# Altium PCB main_b.PcbDoc
Units mil, origin at the board's own origin, x right, y up, seen from the top; angles counter-clockwise.
Board outline 5511.81 x 2559.06 mil, 2 copper layers (Top Layer, Bottom Layer); 38 components, 33 nets, 192 pads, 5 vias.
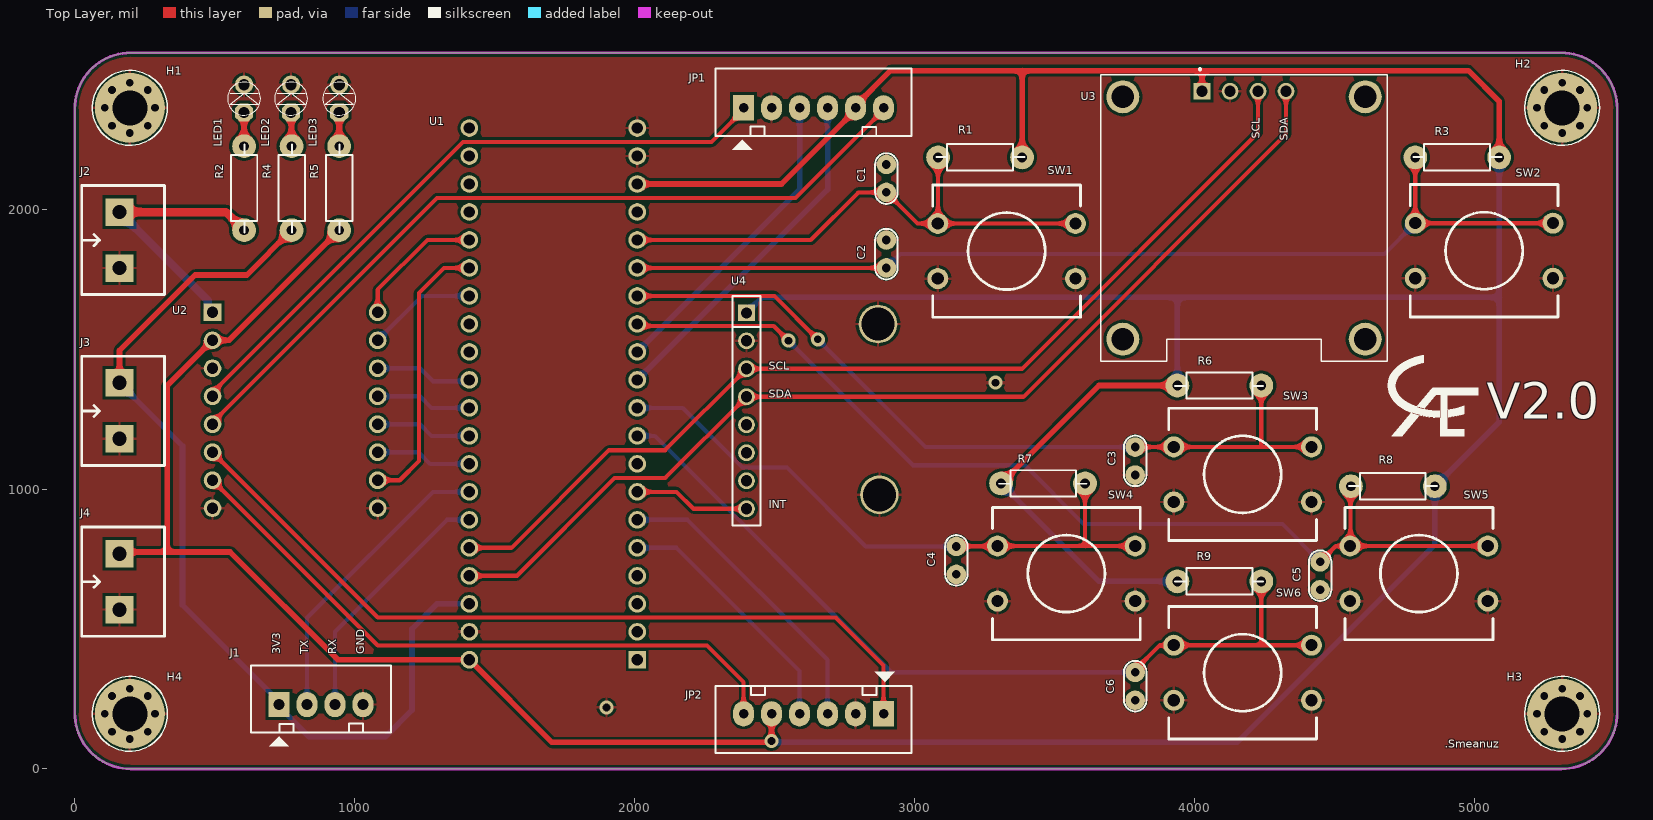
[diagram p0: Top Layer view]
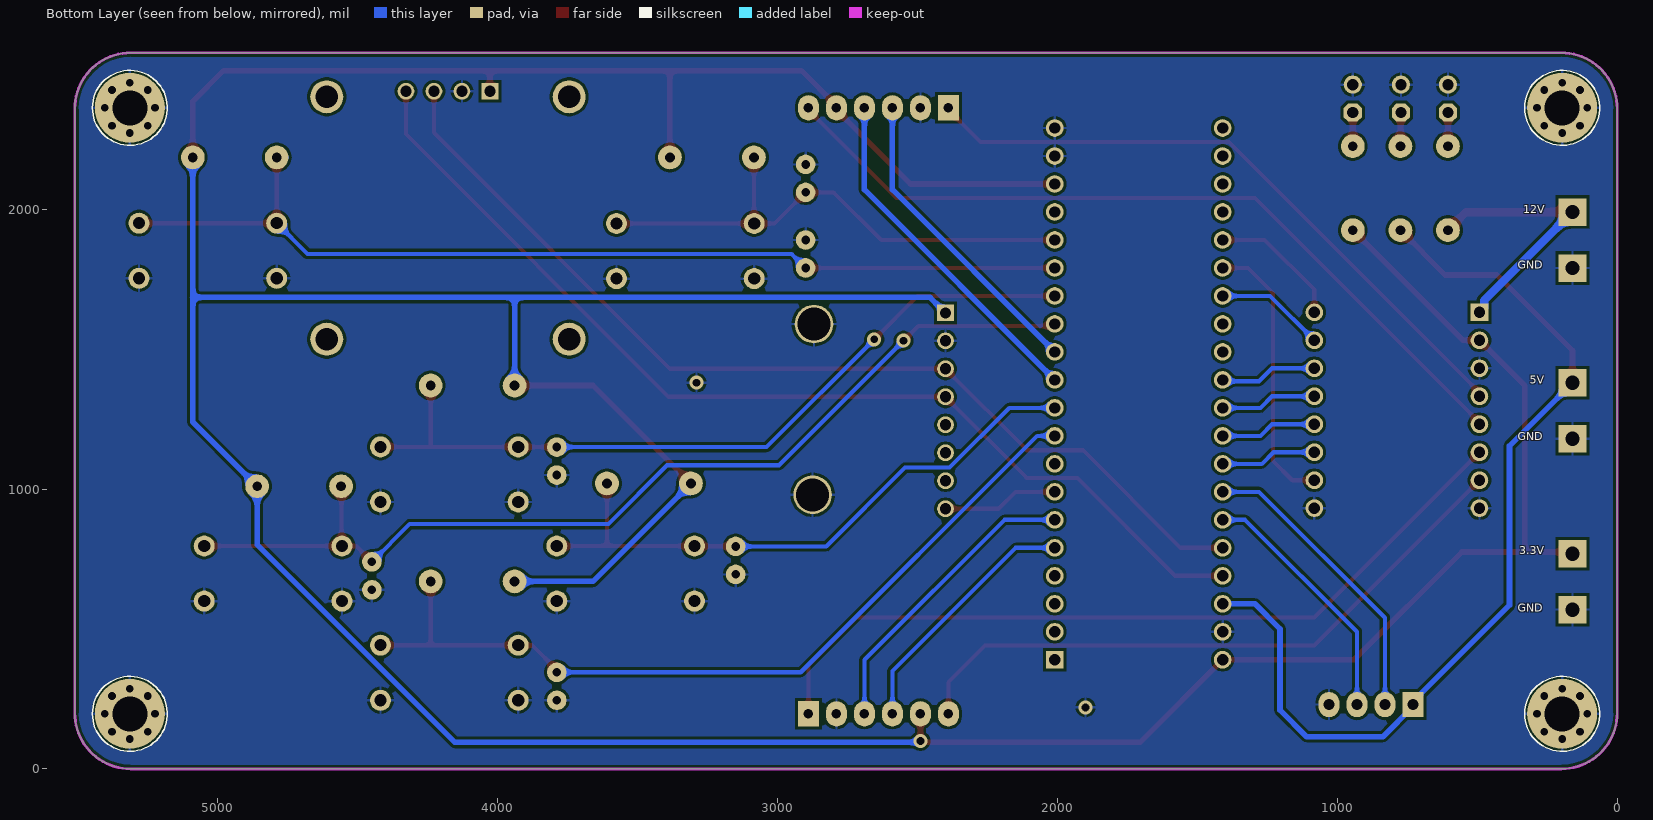
[diagram p1: Bottom Layer view, seen from below]

## Layer stack, top to bottom
Top Solder: solder mask 0.4, Solder Resist, Dk 3.5
Top Layer: signal copper 1.4
Dielectric 1: dielectric 12.6, FR-4, Dk 4.8
Bottom Layer: signal copper 1.4
Bottom Solder: solder mask 0.4, Solder Resist, Dk 3.5

## Board outline
0,200 0,2359.06 cw(c200,2359.06) 200,2559.06 5311.81,2559.06 cw(c5311.81,2359.06) 5511.81,2359.06 5511.81,200 cw(c5311.81,200) 5311.81,0 200,0 cw(c200,200)

## Design rules (kind name [scope] priority, off if disabled: settings)
Clearance [All] p1: gap=10 ignorepadtopadclearanceinfootprint=FALSE
PolygonConnect [All] p1: connectstyle=Relief reliefconductorwidth=10 reliefentries=4 polygonreliefangle="90 Angle" airgapwidth=10
RoutingVias [All] p1: holewidth=28 width=50 viastyle="Through Hole" minholewidth=28 minwidth=50 maxholewidth=28 maxwidth=50
SolderMaskExpansion [All] p1: expansion=0 istentingtop=FALSE
SupplyNets "Schematic Supply Nets_3" [InNet('3V3')] p1: voltage=0.000
SupplyNets "Schematic Supply Nets_2" [InNet('12V')] p2: voltage=0.000
SupplyNets "Schematic Supply Nets_1" [InNet('GND')] p3: voltage=0.000
SupplyNets "Schematic Supply Nets" [InNet('5V')] p4: voltage=0.000
Width [All] p1: maxlimit=30 minlimit=15 preferedwidth=20 minimp=50.000000 maximp=50.000000 favimp=50.000000
30 further rules are at their usual default settings.

## Components (designator, comment, footprint, x,y, rotation, side; value= is the part's Value field where it differs from the comment)
C1 "100nF" CN1 2900,2110 r270 top value=33pF
C2 "100nF" CN1 2900,1840 r270 top value=33pF
C3 "100nF" CN1 3789.37,1100 r90 top value=33pF
C4 "100nF" CN1 3150,745 r90 top value=33pF
C5 "100nF" CN1 4450,690 r90 top value=33pF
C6 "100nF" CN1 3789.37,295.28 r90 top value=33pF
H1 "M3" M3 196.85,2362.2 r0 top
H2 "M3" M3 5314.96,2362.2 r0 top
H3 "M3" M3 5314.96,196.85 r0 top
H4 "M3" M3 196.85,196.85 r0 top
J1 "Header4" Header4 730,230 r0 top
J2 "KF2" KF2-5.08 160,1889.76 r270 top
J3 "KF2" KF2-5.08 160,1279.53 r270 top
J4 "KF2" KF2-5.08 160,669.29 r270 top
JP1 "Encoder_A" Header6 2390,2362.2 r0 top
JP2 "Encoder_B" Header6 2890,196.85 r180 top
LED1 "LED" LED-3MM-GREEN 605,2345 r90 top value="LED 3 ly Single Colour"
LED2 "LED" LED-3MM-GREEN 773.05,2345 r90 top value="LED 3 ly Single Colour"
LED3 "LED" LED-3MM-BLUE 945,2400 r90 top value="LED 3 ly Single Colour"
R1 "10K" RES-1/4W-SMALL 3245,2185 r180 top
R2 "10K" RES-1/4W-SMALL 605,2065 r90 top
R3 "10K" RES-1/4W-SMALL 4950,2185 r180 top
R4 "10K" RES-1/4W-SMALL 775,2065 r90 top
R5 "10K" RES-1/4W-SMALL 945,2065 r90 top
R6 "10K" RES-1/4W-SMALL 4080,1370 r0 top
R7 "10K" RES-1/4W-SMALL 3450,1020 r0 top
R8 "10K" RES-1/4W-SMALL 4720,1010 r180 top
R9 "10K" RES-1/4W-SMALL 4080,670 r0 top
SW1 "SW" SW1-DIP-12x12x8-Red 3330,1850.39 r180 top value="SW chip 2 pin"
SW2 "SW" SW1-DIP-12x12x8-Red 5036.06,1851.57 r180 top value="SW chip 2 pin"
SW3 "SW" SW1-DIP-12x12x8-Red 4173.23,1052.36 r180 top value="SW chip 2 pin"
SW4 "SW" SW1-DIP-12x12x8-Red 3543.31,698.03 r180 top value="SW chip 2 pin"
SW5 "SW" SW1-DIP-12x12x8-Red 4803.15,698.03 r180 top value="SW chip 2 pin"
SW6 "SW" SW1-DIP-12x12x8-Red 4173.23,343.7 r180 top value="SW chip 2 pin"
U1 "STM32_Bluepill" STM32F103_BluePill 1710,1340 r180 top
U2 "TB6612" TB6612 787.4,1279.53 r0 top
U3 "OLED_0.96INCH" OLED_0.96-inch 4173.23,1968.5 r0 top
U4 "MPU6050" MPU6050 2637.8,1279.53 r270 top

## Footprints (in the part's own frame and the unit in brackets; to place one, negate y for a bottom-side part, rotate by r counter-clockwise, add the part's x,y. Pads: shape width x height; smd on the part's side, far side on the other; paste and mask are expansions set on the pad)
CN1 [mil]
  round 70 hole 31: 1(-50,0) 2(50,0)
  silkscreen extent -90,-40 91,40, body extent -115,-33 115,33, height 265
Header4 [mil] "CON4"
  rect 75x90 hole 40: 1(0,0)
  oval 75x90 hole 40: 2(100,0) 3(200,0) 4(300,0)
  silkscreen extent -100,-150 400,140, body extent -92,-91 400,137, height 276
Header6 [mil] "CON6"
  rect 75x90 hole 34: 1(0,0)
  oval 75x90 hole 34: 2(100,0) 3(200,0) 4(300,0) 5(400,0) 6(500,0)
  silkscreen extent -100,-150 600,140, body extent -92,-100 592,130, height 284
KF2-5.08 [mm]
  rect 2.5x2.5 hole 1.3: 1(-2.54,0) 2(2.54,0)
  silkscreen extent -4.95,-3.43 4.95,4.08, body extent -5,-3.43 5,4.07, height 10
LED-3MM-BLUE [mil]
  oct 65x65 hole 40: 1(-55,0)
  round 65 hole 40: 2(45,0)
  silkscreen extent -64,-59 54,59, body extent -72,-65 54,65, height 184
LED-3MM-GREEN [mil]
  oct 65x65 hole 40: 1(0,0)
  round 65 hole 40: 2(100,0)
  silkscreen extent -9,-59 109,59, body extent -15,-70 112,60, height 182
M3 [mm]
  round 1 hole 0.7: 1(-2.286,0) 1(-1.616,-1.616) 1(-1.616,1.616) 1(0,-2.286) 1(0,2.286) 1(1.616,-1.616) 1(1.616,1.616) 1(2.286,0)
  round 6.35 hole 3.18: 1(0,0)
  silkscreen extent -3.4,-3.4 3.4,3.4
MPU6050 [mm]
  rect 1.52x1.52 hole 1.02: 1(-8.89,-6.033)
  round 3.5 hole 3: 2(-7.874,5.905) 2(7.62,6.033)
  round 1.52 hole 1.02: 2(-6.35,-6.033) 3(-3.81,-6.033) 4(-1.27,-6.032) 5(1.27,-6.032) 6(3.81,-6.032) 7(6.35,-6.032) 8(8.89,-6.032)
  silkscreen extent -10.41,-7.3 10.41,-4.76, body extent -10.67,-7.3 10.44,8.57, height 14.54
OLED_0.96-inch [mm] "LCD OLED SSD1306 0.96inch 128x64"
  rect 1.52x1.52 / inner round 1.52 / far side rect 1.52x1.52 hole 1.02: 1(-3.683,11.5)
  round 1.52 hole 1.02: 2(-1.143,11.5) 3(1.397,11.5) 4(3.937,11.5)
  round 3 hole 2.04: S1(-10.873,11) S2(11.127,11) S3(11.127,-11) S4(-10.873,-11)
  silkscreen extent -12.87,-13 13.13,13.6, body extent -12.87,-13 13.13,13, height 5.66
RES-1/4W-SMALL [mil]
  round 85 hole 35: 1(-140,0) 2(160,0)
  silkscreen extent -148,-47 166,47, body extent -152,-47 172,47, height 97
STM32F103_BluePill [mm]
  rect 1.6x1.6 hole 1.02: 1(-7.62,24.13)
  round 1.6 hole 1.02: 2(-7.62,21.59) 3(-7.62,19.05) 4(-7.62,16.51) 5(-7.62,13.97) 6(-7.62,11.43) 7(-7.62,8.89) 8(-7.62,6.35) 9(-7.62,3.81) 10(-7.62,1.27) 11(-7.62,-1.27) 12(-7.62,-3.81) 13(-7.62,-6.35) 14(-7.62,-8.89) 15(-7.62,-11.43) 16(-7.62,-13.97) 17(-7.62,-16.51) 18(-7.62,-19.05) 19(-7.62,-21.59) 20(-7.62,-24.13) 21(7.62,-24.13) 22(7.62,-21.59) 23(7.62,-19.05) 24(7.62,-16.51) 25(7.62,-13.97) 26(7.62,-11.43) 27(7.62,-8.89) 28(7.62,-6.35) 29(7.62,-3.81) 30(7.62,-1.27) 31(7.62,1.27) 32(7.62,3.81) 33(7.62,6.35) 34(7.62,8.89) 35(7.62,11.43) 36(7.62,13.97) 37(7.62,16.51) 38(7.62,19.05) 39(7.62,21.59) 40(7.62,24.13)
  body extent -11.41,-27.16 11.45,31.26, height 22
SW1-DIP-12x12x8-Red [mm] "SW button 4pin, 12x12mm"
  round 1.905 hole 1.1: 1(-6.25,2.5) 1(6.25,2.5) 2(-6.25,-2.5) 2(6.25,-2.5)
  silkscreen extent -6.71,-6.01 6.71,6.01, body extent -6.71,-6.01 6.71,6.01, height 7.87
TB6612 [mm]
  rect 1.6x1.6 hole 1.02: 1(-7.493,8.941)
  round 1.6 hole 1.02: 2(-7.493,6.401) 3(-7.493,3.861) 4(-7.493,1.321) 5(-7.493,-1.219) 6(-7.493,-3.759) 7(-7.493,-6.299) 8(-7.493,-8.839) 9(7.493,-8.839) 10(7.493,-6.299) 11(7.493,-3.759) 12(7.493,-1.219) 13(7.493,1.321) 14(7.493,3.861) 15(7.493,6.401) 16(7.493,8.941)
  body extent -10.45,-10.49 10.45,10.49

## Part data
C1 C2 C3 C4 C5 C6: library part Cap
J1: "Header IDC, 4 x 1 Pin Vertical 2.54mm Pitch (Non-Boxed, Male)", Manufacturer="W¨¹rth Elektronik eiSos GmbH", partNo=613002143121, ComponentLink1 Description=Manufacturer, ComponentLink1URL=http://www.we-online.com, ComponentLink2 Description=Datasheet, ComponentLink2URL=http://katalog.we-online.de/em/datasheet/6130xx143121.pdf, Created by="Karrer Zheng", Created Date="29 March 2013", NoPins=02
J2 J3 J4: Manufacturer="Würth Elektronik eiSos GmbH", partNo=691103110002, ComponentLink1 Description=Manufacturer, ComponentLink1URL=http://www.we-online.com, ComponentLink2 Description=Datasheet, ComponentLink2URL=http://katalog.we-online.de/em/datasheet/6911031100xx.pdf, Created by="Karrer Zheng", Created Date="29 October 2013", NoPins=2
JP1 JP2: library part Header6, "Header IDC, 6 x 1 Pin Vertical 2.54mm Pitch (Non-Boxed, Male)", Manufacturer="W¨¹rth Elektronik eiSos GmbH", partNo=613002143121, ComponentLink1 Description=Manufacturer, ComponentLink1URL=http://www.we-online.com, ComponentLink2 Description=Datasheet, ComponentLink2URL=http://katalog.we-online.de/em/datasheet/6130xx143121.pdf, Created by="Karrer Zheng", Created Date="29 March 2013", NoPins=02
LED1 LED2 LED3: "LED Single colour Green and Red"
R1 R2 R3 R4 R5 R6 R7 R8 R9: library part Res, "Res", Manufacturer="Generic Components", Class=Passive, Published=08/06/2000, Publisher="Altium Hobart Technology Centre", SubClass=R
SW1 SW2 SW3 SW4 SW5 SW6: library part SW2, "Switch button 2 pin"
U4: Manufacturer="W¨¹rth Elektronik eiSos GmbH", partNo=613004143121, ComponentLink1 Description=Manufacturer, ComponentLink1URL=http://www.we-online.com, ComponentLink2 Description=Datasheet, ComponentLink2URL=http://katalog.we-online.de/em/datasheet/6130xx143121.pdf, Created by="Karrer Zheng", Created Date="29 March 2013", NoPins=04

## Via types
v1: diameter 50, hole 28, Top Layer to Bottom Layer, tented both sides, 4 vias
v2: diameter 50, hole 28, Top Layer to Bottom Layer, 1 vias

## Nets (pads, with @x,y where several pads share a name; then routed paths per layer and width w, separated by ;. In a path a pad name is that pad's centre, name@x,y a point inside that pad or via, vN(x,y) a via of type N, cw(c..) or ccw(c..) an arc to the next point about the centre after c; other vN are vias at no path point)
3V3: J4.1 JP1.5 JP2.5 R1.1 R3.1 R5.1 R6.1 R7.1 R8.1 R9.1 U1.18 U1.40 U2.2 U3.1 U4.1 | length 16759.3
  Top Layer w20: J4.1 165.71,775 330,775 ; R5.1 551.53,1531.53 U2.2 330,1369.13 330,775 ; U1.18 2525.3,2090 2790,2354.7 JP1.5 2790,2369.7 2915.3,2495 3385,2495 ; JP2.5 v2(2490,100) 2485,95 1740,95 1705,95 U1.40 940,390 555,775 330,775 ; R7.1 3660,1370 R6.1 ; R1.1 3385,2495 ; U3.1 4028.23,2495 ; R3.1 5090,2385 4980,2495 4028.23,2495 ; 3385,2495 4028.23,2495
  Bottom Layer w20: U4.1 2455.77,1685 3940,1685 ; v2(2490,100) 2495,95 4153.48,95 4860,801.52 R8.1 5090,1240 5090,1685 ; R7.1 3660,670 R9.1 ; R6.1 3940,1685 ; R3.1 5090,1685 ; 3940,1685 5090,1685
5V: J1.1 J3.1 R4.1 U1.38 | length 3386.8
  Top Layer w20: J3.1 160,1495 430,1765 615,1765 R4.1 ; J1.1@730,222.5 J1.1
  Bottom Layer w20: J3.1 385,1154.53 385,585 702.5,267.5 702.5,265 723.96,243.54 J1.1@726.46,243.54 ; J1.1 730,222.5 837.5,115 1110,115 1205,210 1205,500 1295,590 U1.38
12V: J2.1 R2.1 U2.1 | length 967.7
  Top Layer w30: J2.1 540.24,1989.76 R2.1
  Bottom Layer w30: J2.1 475.91,1673.86 475.91,1648.02 U2.1
AIN1: U1.30 U2.14 | length 348.9
  Bottom Layer w15: U2.14 1233.47,1431.53 1280,1385 1405,1385 U1.30
AIN2: U1.27 U2.15 | length 393.2
  Bottom Layer w15: U2.15 1240.87,1690 U1.27
BIN1: U1.32 U2.12 | length 344.8
  Bottom Layer w15: U2.12 1233.47,1231.53 1275,1190 U1.32
BIN2: U1.33 U2.11 | length 344.8
  Bottom Layer w15: U2.11 1228.47,1131.53 1270,1090 U1.33
BTN_DEC: C1.2 R1.2 SW1.2 U1.16 | length 1929.8
  Top Layer w15: U1.16 2630,1890 2800,2060 C1.2 C1.2@2900.79,2059.21 ; C1.2@2908.43,2060 C1.2@2909.21,2059.21 ; C1.2@2910,2058.43 C1.2@2909.21,2059.21 ; R1.2 3084.47,2184.47 3084.47,1949.35 SW1.2@3083.94,1948.82 ; SW1.2@3576.06,1948.82 SW1.2@3083.94,1948.82 ; C1.2@2900.79,2059.21 3011.18,1948.82 SW1.2@3083.94,1948.82 ; C1.2@2900.79,2059.21 C1.2@2909.21,2059.21
BTN_DOWN: C6.2 R9.2 SW6.2 U1.9 | length 3032.5
  Top Layer w15: C6.2 3789.37,354.37 3875.95,440.95 3925.99,440.95 3927.17,442.13 4240,442.13 ; R9.2 4240,442.13 ; SW6.2@4419.29,442.13 4240,442.13
  Bottom Layer w15: U1.9 2072.76,1190 2917.48,345.28 C6.2
BTN_INC: C2.2 R3.2 SW2.2 U1.15 | length 3574.2
  Top Layer w15: U1.15 C2.2 ; R3.2 4790,1950 SW2.2@5282.13,1950
  Bottom Layer w15: C2.2 2950,1840 4680,1840 SW2.2@4790,1950 ; R3.2@4754.47,2184.47 R3.2@4755,2185
BTN_LEFT: C4.2 R7.2 SW4.2 U1.10 | length 2208.6
  Top Layer w15: C4.2 3150.73,795.73 3296.52,795.73 3297.24,796.46 3610,796.46 ; R7.2 3610,796.46 ; SW4.2@3789.37,796.46 3610,796.46
  Bottom Layer w15: U1.10 2172.76,1290 2385.81,1076.95 2544.6,1076.95 2826.55,795 C4.2
BTN_RIGHT: C5.2 R8.2 SW5.2 U1.13 | length 3629.4
  Top Layer w15: U1.13 2017.89,1582.11 2497.89,1582.11 v1(2550,1530) ; C5.2 4505.87,795.87 4556.5,795.87 SW5.2@4557.09,796.46 ; R8.2 4558.54,1008.54 4558.54,797.91 SW5.2@4557.09,796.46 ; SW5.2@5049.21,796.46 SW5.2@4557.09,796.46
  Bottom Layer w15: v1(2550,1530) 2995,1085 3395,1085 3605,875 4315,875 C5.2
BTN_UP: C3.2 R6.2 SW3.2 U1.14 | length 2854.6
  Top Layer w15: U1.14 2500,1690 v1(2655,1535) ; C3.2 3789.76,1150.39 3926.77,1150.39 3927.17,1150.79 4235,1150.79 ; R6.2 4240,1155.79 4235,1150.79 ; SW3.2@4419.29,1150.79 4235,1150.79
  Bottom Layer w15: v1(2655,1535) 3040,1150 C3.2
DBG_RX: J1.3 U1.35 | length 905.7
  Bottom Layer w15: J1.3 930,490 1330,890 U1.35
DBG_TX: J1.2 U1.34 | length 1076.4
  Bottom Layer w15: J1.2 830,540 1280,990 U1.34
EnA_C1/A: JP1.3 U1.12 | length 1112.4
  Bottom Layer w20: U1.12 2590,2070 JP1.3
EnA_C1/B: JP1.4 U1.11 | length 1253.9
  Bottom Layer w20: U1.11 2690,2070 JP1.4
EnA_M1: JP1.1 U2.4 | length 2336.5
  Top Layer w15: U2.4 492.4,1344.51 1387.89,2240 2275.3,2240 2390,2354.7 JP1.1
EnA_M2: JP1.6 U2.5 | length 2874
  Top Layer w15: U2.5 492.4,1237.76 1294.64,2040 2575.3,2040 2890,2354.7 JP1.6
EnB_C1/A: JP2.3 U1.6 | length 1080.3
  Bottom Layer w15: U1.6 2190,890 2690,390 JP2.3
EnB_C1/B: JP2.4 U1.5 | length 915.4
  Bottom Layer w15: U1.5 2150,790 2590,350 JP2.4
EnB_M1: JP2.1 U2.6 | length 2886.2
  Top Layer w15: U2.6 1082.93,541 2719,541 2890,370 JP2.1
EnB_M2: JP2.6 U2.7 | length 2309.6
  Top Layer w15: U2.7 1082.93,441 2259,441 2390,310 JP2.6
GND: C1.1 C2.1 C3.1 C4.1 C5.1 C6.1 H1.1 H2.1 H3.1 H4.1 J1.4 J2.2 J3.2 J4.2 JP1.2 JP2.2 LED1.2 LED2.2 LED3.2 SW1.1 SW2.1 SW3.1 SW4.1 SW5.1 SW6.1 U1.19 U1.20 U1.39 U2.3 U2.8 U2.9 U3.2 U4.2
  other v1: 1900,220 3290,1380
MPU_INT: U1.7 U4.8 | length 415.3
  Top Layer w15: U1.7 2150,990 2210.47,929.53 U4.8
MPU_SCL: U1.36 U3.3 U4.3 | length 3580.6
  Top Layer w15: U1.36 1560,790 1909,1139 2109.76,1139 U4.3 3384.53,1429.53 4228.23,2273.23 U3.3
MPU_SDA: U1.37 U3.4 U4.4 | length 3725
  Top Layer w15: U1.37 1580,690 1929,1039 2109.76,1039 U4.4 3389.53,1329.53 4328.23,2268.23 U3.4
NetLED1_1: LED1.1 R2.2 | length 120
  Top Layer w20: R2.2 LED1.1
NetLED2_1: LED2.1 R4.2 | length 120.8
  Top Layer w20: LED2.1 774.02,2344.02 774.02,2225.98 R4.2
NetLED3_1: LED3.1 R5.2 | length 120
  Top Layer w20: R5.2 LED3.1
PWM_A: U1.25 U2.16 | length 482
  Top Layer w15: U2.16 1082.4,1712.4 1260,1890 U1.25
PWM_B: U1.26 U2.10 | length 993.2
  Top Layer w15: U2.10 1161.53,1031.53 1230,1100 1230,1700 1320,1790 U1.26
STBY: U1.31 U2.13 | length 344.8
  Bottom Layer w15: U2.13 1233.47,1331.53 1275,1290 U1.31
pads on no net: U1.1 U1.2 U1.3 U1.4 U1.8 U1.17 U1.21 U1.22 U1.23 U1.24 U1.28 U1.29 U3.S1 U3.S2 U3.S3 U3.S4 U4.5 U4.6 U4.7

## Polygon pours and split planes (outlines as drawn)
GND on Bottom Layer "GND_L02_P001" (solid, remove dead copper, pour order 1): -205,2690 5655,2690 5735,2610 5710,2585 5710,-235 -155,-235 -185,-205
GND on Top Layer "GND_L01_P000" (solid, remove dead copper, pour order 0): -90,2605 -45,2650 5540,2650 5540,-5 5485,-60 5455,-30 -110,-30

## Keep-outs
Keep-Out Layer:
  the board outline again, w10

## Silkscreen, mask and mechanical layers (free items; w line width, h text height)
Top Overlay:
  region: 2225 vertices and 17 holes, not listed, extent 4692.26,1188.08 5015.14,1478.8
  text "SCL" at 4244.4,2251.1 h50 r90
  text "SDA" at 4344.4,2245 h50 r90
  text "SCL" at 2480,1415.6 h50
  text "SDA" at 2480,1315.6 h50
  text "V2.0" at 5045,1207.65 h220
  text "INT" at 2480,920 h50
  text "3V3" at 744.4,410 h50 r90
  text "TX" at 845,410 h50 r90
  text "RX" at 945,410 h50 r90
  text "GND" at 1044.4,410 h50 r90
  text ".Smeanuz" at 4895.05,65.55 h50
Bottom Overlay:
  text "12V" at 336.1,1975 h50
  text "GND" at 355,1775.6 h50
  text "5V" at 312.77,1365.39 h50
  text "GND" at 355,1163.1 h50
  text "3.3V" at 350.38,755.6 h50
  text "GND" at 355,550.6 h50